# EAGLE board gauge (EAGLE 7.7.0)
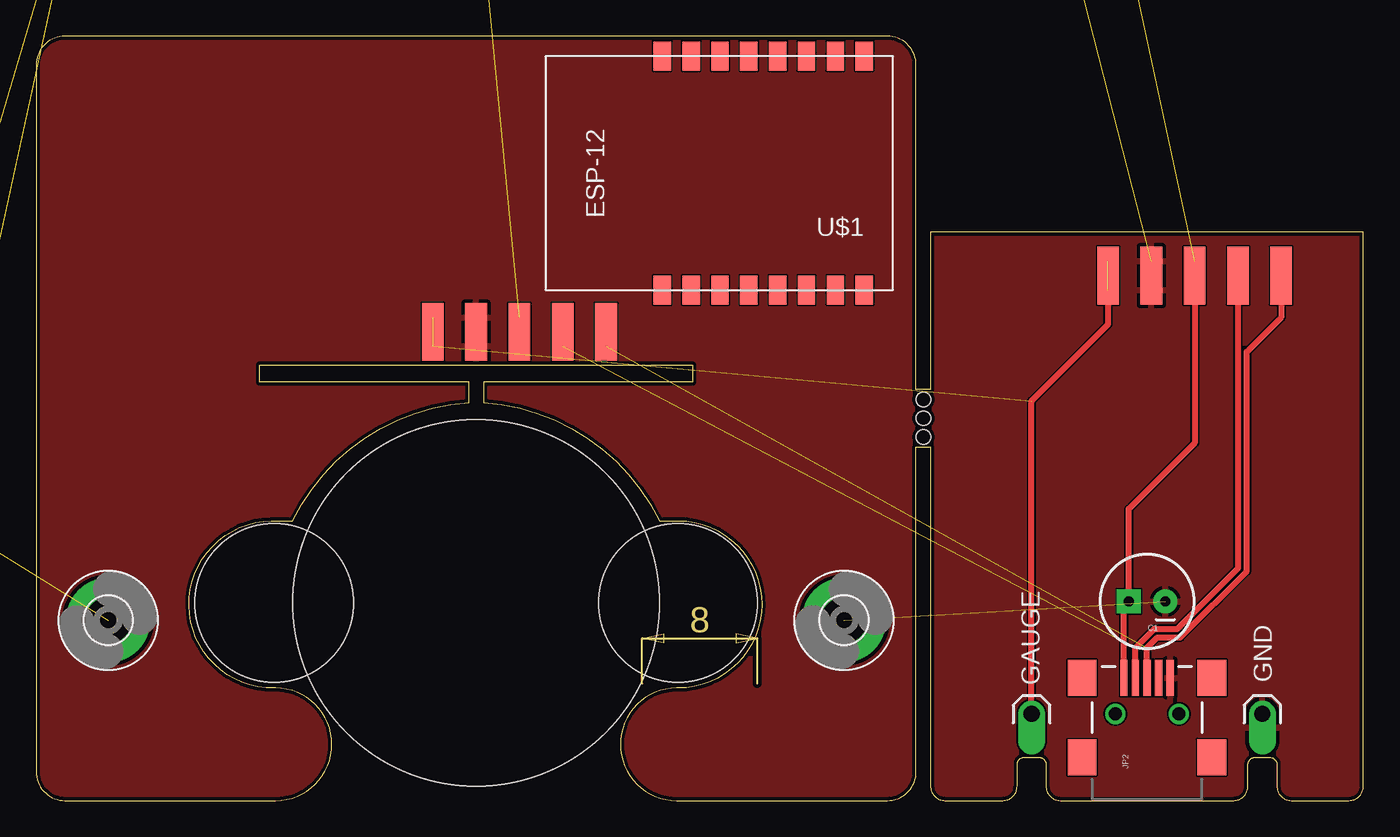
[diagram p0: board, top side]
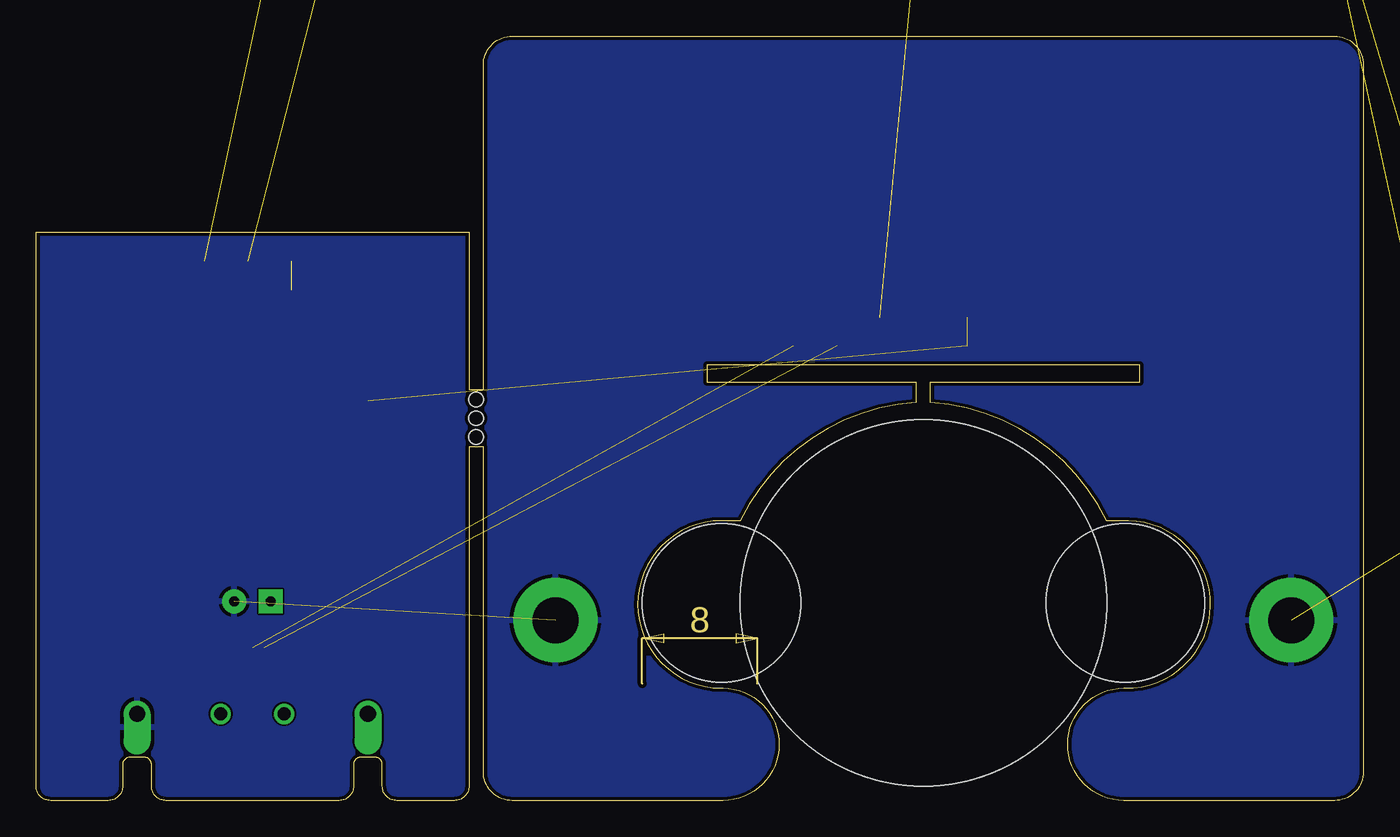
[diagram p1: board, bottom side, seen from below]

Size 92 x 53 mm. Coordinates in mm from the lower left corner, seen from the top.
Outline: 0,51 0,2 arc90 2,0 16.6,0 arc180 16.6,7.8 16.5,7.8 arc-180 16.3,19.4 17.8,19.4 arc-60 30,27.6 30,29 15.5,29 15.5,30.2 45.5,30.2 45.5,29 31,29 31,27.6 arc-60 43.2,19.4 44.5,19.4 arc-180 44.5,7.8 44.4,7.8 arc180 44.4,0 59,0 arc90 61,2 61,24.5 62,24.5 62,1 arc90 63,0 67,0 arc90 68,1 68,2.5 arc-90 68.5,3 69.5,3 arc-90 70,2.5 70,1 arc90 71,0 83,0 arc90 84,1 84,2.5 arc-90 84.5,3 85.5,3 arc-90 86,2.5 86,1 arc90 87,0 91,0 arc90 92,1 92,39.4 62,39.4 62,28.5 61,28.5 61,51 arc90 59,53 2,53 arc90 0,51
Copper layers (1*16): Top 0.035mm / dielectric 1.5mm / Bottom 0.035mm
Design rules "dirtypcbs": minimum track width 5mil, minimum drill 12mil, track to track 5mil, track to pad 5mil, pad to pad 5mil, via to via 5mil, smd to smd 0mil, copper to edge 10mil, drill to drill 10mil, minimum pad ring 10mil, minimum via ring 6mil, stop-mask expansion 2mil, vias tented up to drill 25mil, thermal gap 10mil
Holes 25.4 mm at 30.5,13.7
Holes 11 mm at 44.5,13.7 16.5,13.7
Holes 1 mm at 61.5,27.8 61.5,26.5 61.5,25.2

## Footprints (pad centres in the part's own frame; a part is rotated, then mirrored left to right if it is on the bottom)
CPOL-RADIAL-100UF-25V = drill 0.7 pad 1.651 square: 1 1.27,0 | drill 0.7 pad 1.651: 2 -1.27,0
1X01_OFFSET = drill 1.118 pad 1.88 offset: 1 0,0
3,2-PAD = drill 3.2 pad 5.842: B3,2 0,0
PAD-1.5X4.5 = smd 1.5 x 2: P$1 0,0
USB-MINIB-NOSTOP = smd 2.5 x 0.5: D+ 2.5,0; D- 2.5,0.8; GND 2.5,-1.6; ID 2.5,-0.8; VBUS 2.5,1.6 | smd 2.5 x 2: G1 -3,-4.5; G2 -3,4.5; G3 2.5,4.5; G4 2.5,-4.5 | drill 0.9 pad 0.8: H1 0,2.2 | drill 0.9 pad 0.787: H2 0,-2.2
LED-TRICOLOR-5050-IC = smd 2 x 1.1: 1 -2.4,1.7; 2 -2.4,0; 3 -2.4,-1.7; 4 2.4,-1.7; 5 2.4,0; 6 2.4,1.7
ESP8266-ESP12 = smd 2 x 1.2: 1 16.2,2; 2 16.2,4; 3 16.2,6; 4 16.2,8; 5 16.2,10; 6 16.2,12; 7 16.2,14; 8 16.2,16; 9 0,16; 10 0,14; 11 0,12; 12 0,10; 13 0,8; 14 0,6; 15 0,4; 16 0,2

## Placement (x,y rotation side)
C1  [CPOL-RADIAL-100UF-25V]  77,13.8 180 top
GAUGE  [1X01_OFFSET]  69,6 180 top
GND  [1X01_OFFSET]  85,6 180 top
H1  MOUNT-PAD-ROUND3.2  [3,2-PAD]  56,12.5 0 top
H2  MOUNT-PAD-ROUND3.2  [3,2-PAD]  5,12.5 0 top
JP1  [PAD-1.5X4.5]  86.3,35.4 0 top
JP2  USB-SMD-NS  [USB-MINIB-NOSTOP]  77,6 90 top
JP3  [PAD-1.5X4.5]  30.5,31.5 0 top
JP4  [PAD-1.5X4.5]  30.5,33.5 0 top
JP5  [PAD-1.5X4.5]  77.3,37.4 0 top
JP6  [PAD-1.5X4.5]  77.3,35.4 0 top
JP7  [PAD-1.5X4.5]  80.3,35.4 0 top
JP8  [PAD-1.5X4.5]  80.3,37.4 0 top
JP9  [PAD-1.5X4.5]  33.5,33.5 0 top
JP10  [PAD-1.5X4.5]  33.5,31.5 0 top
JP11  [PAD-1.5X4.5]  86.3,37.4 0 top
JP12  [PAD-1.5X4.5]  39.5,31.5 0 top
JP13  [PAD-1.5X4.5]  39.5,33.5 0 top
JP14  [PAD-1.5X4.5]  36.5,33.5 0 top
JP15  [PAD-1.5X4.5]  36.5,31.5 0 top
JP16  [PAD-1.5X4.5]  83.3,35.4 0 top
JP17  [PAD-1.5X4.5]  83.3,37.4 0 top
JP18  [PAD-1.5X4.5]  27.5,33.5 0 top
JP19  [PAD-1.5X4.5]  74.3,35.4 0 top
JP20  [PAD-1.5X4.5]  74.3,37.4 0 top
JP21  [PAD-1.5X4.5]  27.5,31.5 0 top
U1  WS2811  [LED-TRICOLOR-5050-IC]  -7.1,23.4 270 bottom  (outside the outline)
U2  WS2811  [LED-TRICOLOR-5050-IC]  0.3,64.6 0 bottom  (outside the outline)
U3  WS2811  [LED-TRICOLOR-5050-IC]  28.4,63.4 0 bottom  (outside the outline)
U4  WS2811  [LED-TRICOLOR-5050-IC]  57.3,64.8 0 bottom  (outside the outline)
U5  WS2811  [LED-TRICOLOR-5050-IC]  73.1,61.5 0 bottom  (outside the outline)
U$1  ESP8266_ESP-12  [ESP8266-ESP12]  59.4,35.4 90 top

## Library data of the parts
C1 = SparkFun-Capacitors; PROD_ID: CAP-08439
GAUGE GND JP1-JP21 = SparkFun-Connectors
H1 H2 = holes
U1-U5 = SparkFun-LED; PROD_ID: DIO-11598
U$1 = ESP8266-ESP12

## Nets
+5V: C1.1 JP2.VBUS JP7.P$1 JP8.P$1 JP9.P$1 JP10.P$1 U1.3 U1.5 U2.3 U2.5 U3.3 U3.5 U4.3 U4.5 U5.3 U5.5
GAUGE: GAUGE.1 JP18.P$1 JP19.P$1 JP20.P$1 JP21.P$1
GND: C1.2 GND.1 H1.B3,2 H2.B3,2 JP2.GND JP3.P$1 JP4.P$1 JP5.P$1 JP6.P$1 U1.6 U2.6 U3.6 U4.6 U5.6
LED: U1.2
N$1: U1.1 U2.2
N$2: U2.1 U3.2
N$3: U3.1 U4.2
N$4: U4.1 U5.2
USB_D_+: JP1.P$1 JP2.D+ JP11.P$1 JP12.P$1 JP13.P$1
USB_D_-: JP2.D- JP14.P$1 JP15.P$1 JP16.P$1 JP17.P$1

## Tracks (layer width: path | path; a pad name or v marks a point on that pad's centre or on a via)
+5V  (11 unrouted)
  Top 0.406: JP8.P$1 JP7.P$1 80.3,24.8 75.73,20.23 C1.1 75.4,13.47 JP2.VBUS | JP10.P$1 JP9.P$1
GAUGE  (3 unrouted)
  Top 0.406: GAUGE.1 69,27.7 74.3,33 JP19.P$1
GND  (6 unrouted)
  pour Bottom: 0,53 92,53 92,0 0,0
  pour Top: 0,53 92,53 92,0 0,0
N$1  (1 unrouted)
N$2  (1 unrouted)
N$3  (1 unrouted)
N$4  (1 unrouted)
USB_D_+  (1 unrouted)
  Top 0.406: JP2.D+ 77,10.6 77.7,11.3 79.3,11.3 83.9,15.9 83.9,31.1 86.3,33.5 JP1.P$1 JP11.P$1 | JP12.P$1 JP13.P$1
USB_D_-  (1 unrouted)
  Top 0.406: JP2.D- 76.2,10.6 77.5,11.9 79.1,11.9 83.3,16.1 JP16.P$1 JP17.P$1 | JP15.P$1 JP14.P$1